# Altium PCB xbowtie.PcbDoc (part 3 of 3)
Units mil, origin at the board's own origin, x right, y up, seen from the top; angles counter-clockwise.
Board outline 3822.83 x 3919.29 mil, 4 copper layers (Top Layer, GND, POWER, Bottom Layer), stack 53.912 mil thick; 127 components, 86 nets, 452 pads, 412 vias.
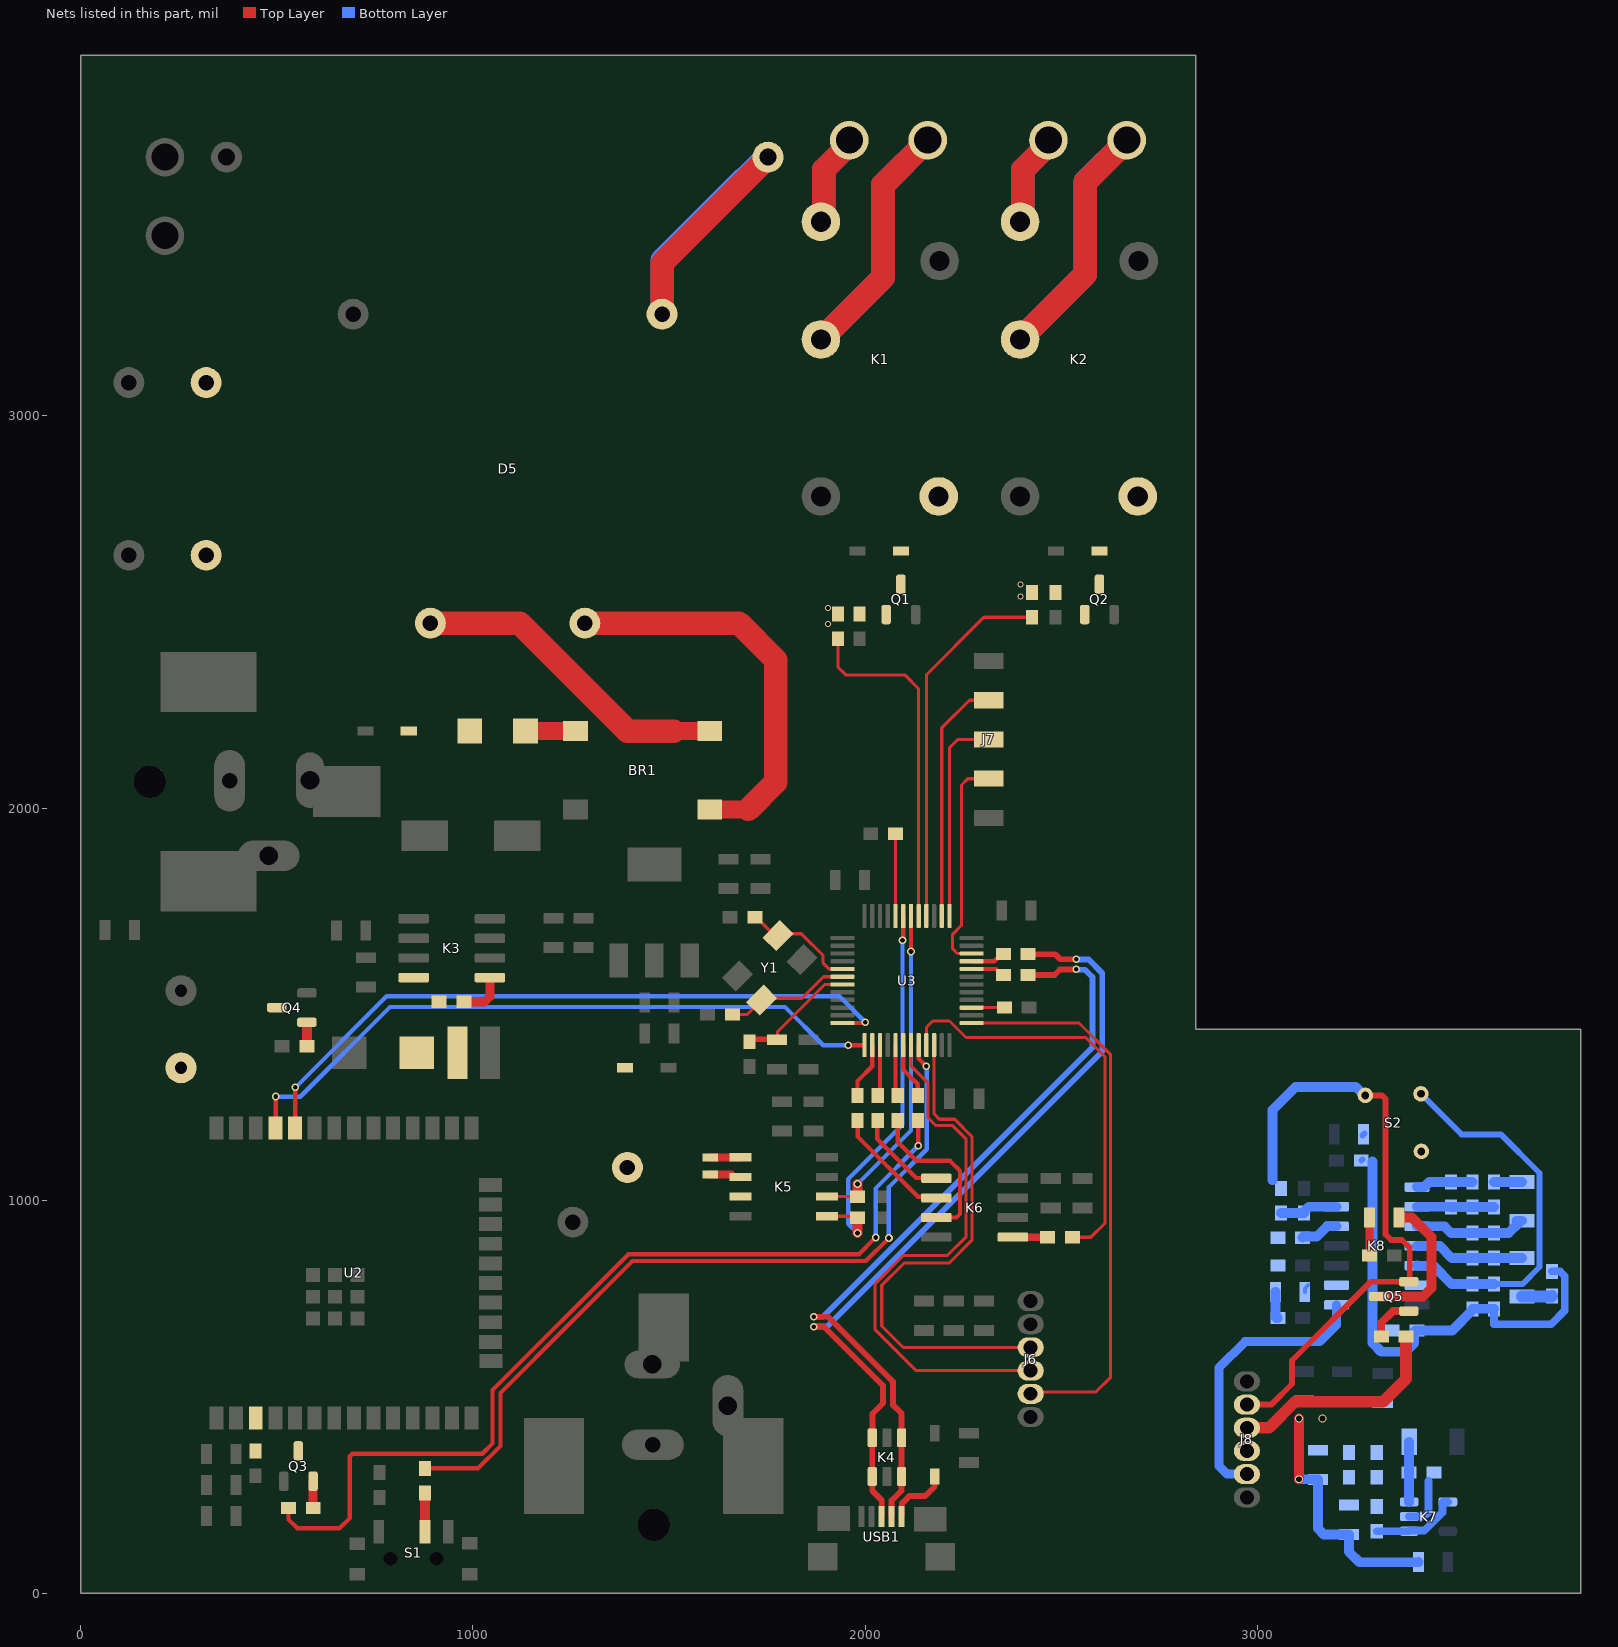
[diagram p4: the nets of this part, all layers, seen from the top]

## Via types
v1: diameter 20, hole 15, Top Layer to Bottom Layer, tented both sides, 304 vias
v2: diameter 19.68, hole 11.81, Top Layer to Bottom Layer, tented both sides, 29 vias
v3: diameter 15, hole 10, Top Layer to Bottom Layer, tented both sides, 28 vias
v4: diameter 19.68, hole 11.81, Top Layer to GND, tented both sides, 18 vias
v5: diameter 19.68, hole 11.81, GND to Bottom Layer, tented both sides, 13 vias
v6: diameter 23.62, hole 13.78, Top Layer to Bottom Layer, tented both sides, 10 vias
v7: diameter 10, hole 7, Top Layer to Bottom Layer, tented both sides, 9 vias
v8: diameter 19.68, hole 11.81, Top Layer to Bottom Layer, tented top, 1 vias

## Nets (pads, with @x,y where several pads share a name; then routed paths per layer and width w, separated by ;. In a path a pad name is that pad's centre, name@x,y a point inside that pad or via, vN(x,y) a via of type N, cw(c..) or ccw(c..) an arc to the next point about the centre after c; other vN are vias at no path point) (continued)
GND_S: C33.1 C34.1 C35.1 C36.1 C37.1 C38.1 C40.1@3263.79,1102.36 C41.1 C43.1@3059.06,1031.5 C46.1@3405.51,669.29 C47.1@3547.24,724.4 J8.2 K7.2 Q5.E R28.2 R35.1 R36.1 R37.1 R38.1 S2.3 | length 3586.9
  Top Layer w15: J8.2@2972.44,480.32 3034.67,480.32 3087.39,533.03 3087.39,592.49 3288.21,793.31 Q5.E@3385.04,793.31 3385.04,795.42 3387.43,797.81 3387.43,880.09 3367.52,900 3340,900 3325.94,914.06 3325.94,1258.95 3316.53,1268.37 S2.3@3274.13,1268.37
  Top Layer w25: v1(3105,290) v1(3105,445)
  Bottom Layer w15: C40.1@3263.79,1102.36 C40.1@3266.8,1105.37 ; C41.1@3266.8,1166.28 C41.1@3269.81,1169.29 C41.1@3271.97,1171.45
  Bottom Layer w20: K7.2@3385.83,194.88 3385.94,195 3423.28,195 3435,206.72 3435,286.01 ; R38.1@3602.36,724.4 3602.36,685.14 3747.64,685.14 3782.5,720 3782.5,807.5 3770,820 R37.1@3750,820
  Bottom Layer w25: 3037.5,1052.29 3037.5,1230.93 3096.57,1290 3249.96,1290 3271.6,1268.37 S2.3@3274.13,1268.37 ; v1(3105,290) 3152.91,290 C35.1@3153.54,289.37 3153.54,164.25 3168.19,149.61 C34.1@3232.28,149.61 3232.28,105.22 3258.76,78.74 C33.1@3409.45,78.74 C33.1@3410,79.29 ; 3292.5,1100 3292.5,637.19 3314.69,615 3376.77,615 3399.01,637.24 3399.01,666.29 3402.01,669.29 C46.1@3405.51,669.29 3495.63,669.29 3547.24,720.9 C47.1@3547.24,724.4 R38.1@3602.36,724.4
  other v1: 3165,445
LED_DRIVER: J6.3 U3.22 | length 1343.1
  Top Layer w8: U3.22@2175.2,1396.46 2175.2,1221.05 2188.75,1207.5 2227.7,1207.5 2271.62,1163.58 2271.62,899.12 2213.75,841.25 2098.75,841.25 2041.96,784.46 2041.96,680.54 2096.52,625.98 J6.3@2421.26,625.98
LED_S: J8.3 R29.1 | length 564.8
  Top Layer w30: J8.3@2972.44,421.26 3028.76,421.26 3095,487.5 3319.5,487.5 3377.96,545.96 R29.1@3377.96,653.54
LIGHT_1_GND: J2.2 K1.3 | length 475.6
  Top Layer w60: K1.3@1886.81,3494.88 1894.16,3502.23 1894.16,3627.47 1959.06,3692.36 J2.2@1959.06,3702.76
  Bottom Layer w60: K1.3@1886.81,3494.88 1894.16,3502.23 1894.16,3627.47 1959.06,3692.36 J2.2@1959.06,3702.76
LIGHT_1_VCC: J2.1 K1.2 | length 1241.3
  Top Layer w60: K1.2@1886.81,3194.88 2045,3353.07 2045,3588.7 J2.1@2159.06,3702.76
  Bottom Layer w60: K1.2@1886.81,3194.88 2045,3353.07 2045,3588.7 J2.1@2159.06,3702.76
LIGHT_2_GND: J5.2 K2.3 | length 475.6
  Top Layer w60: K2.3@2394.29,3494.88 2401.64,3502.23 2401.64,3627.47 2466.54,3692.36 J5.2@2466.54,3702.76
  Bottom Layer w60: K2.3@2394.29,3494.88 2401.64,3502.23 2401.64,3627.47 2466.54,3692.36 J5.2@2466.54,3702.76
LIGHT_2_VCC: J5.1 K2.2 | length 1241.3
  Top Layer w60: K2.2@2394.29,3194.88 2560,3360.59 2560,3595 2666.54,3701.54 J5.1@2666.54,3702.76
  Bottom Layer w60: K2.2@2394.29,3194.88 2560,3360.59 2560,3596.22 J5.1@2666.54,3702.76
NetBR1_1: BR1.1 D5.7 | length 821.4
  Top Layer w45: 1511.81,2196.85 1603.5,2196.85 BR1.1@1603.78,2197.13
  Top Layer w60: D5.7@896.45,2471.89 1118.66,2471.89 1393.7,2196.85 1511.81,2196.85
NetBR1_2: BR1.2 D5.9 | length 1033.3
  Top Layer w45: BR1.2@1603.78,1997.13 1701.85,1997.13
  Top Layer w60: D5.9@1285.08,2471.89 1677.72,2471.89 1771.65,2377.95 1771.65,2066.93 1701.85,1997.13
NetBR1_3: BR1.3 F1.1 | length 127.5
  Top Layer w45: F1.1@1133.78,2197.13 BR1.3@1261.26,2197.13
NetBZ1_1: BZ1.1 Q4.C
NetC7_1: C7.1 C8.1 D4.2 F1.2 | length 2.6
  Bottom Layer w60: C8.1@319.07,3085.93 C8.1@320,3085 ; C7.1@320,2645 C7.1@320.93,2644.07
NetC9_1: C9.1 K3.1 | length 120.3
  Top Layer w23: C9.1@976.66,1506.99 1029.83,1506.99 1043.31,1520.46 K3.1@1043.31,1568.5
NetC9_2: C9.2 D6.2 K3.8 L1.1
NetC18_2: C19.1@1718.5,1722.44 U3.5 Y1.3 | length 293.3
  Top Layer w8: C19.1@1718.5,1722.44 1722,1722.44 1769.03,1675.42 Y1.3@1777.34,1675.42 1782.21,1680.29 1836.81,1680.29 1892.25,1624.84 1892.25,1605.31 1906.84,1590.72 1941.56,1590.72 U3.5@1941.73,1590.55
NetC19_2: C18.1@1661.04,1474.41 U3.6 Y1.1 | length 320.6
  Top Layer w8: C18.1@1661.04,1474.41 1698.82,1474.41 Y1.1@1735.58,1511.17 1740.45,1516.04 1838.54,1516.04 1893.37,1570.87 U3.6@1941.73,1570.87
NetC24_1: C24.1 D7.1 K5.3
NetC34_2: C34.2 R25.1 R26.2 R27.1
NetC39_1: C39.1@3492.13,984.25 K8.2 R30.1 R33.2 | length 196.6
  Bottom Layer w25: K8.2@3405.91,984.65 3406.1,984.45 3491.93,984.45 C39.1@3492.13,984.25 R30.1@3547.24,984.25 R33.2@3602.36,984.25
NetC39_2: C39.1@3492.13,1047.25 K8.1 R30.2 | length 146.6
  Bottom Layer w25: K8.1@3405.91,1034.65 3424.41,1034.65 3437.02,1047.25 C39.1@3492.13,1047.25 R30.2@3547.24,1047.25
NetC42_1: C42.1 C44.1@3547.24,917.33 K8.3 R34.2 | length 298.9
  Bottom Layer w25: K8.3@3405.91,934.65 3475.67,934.65 3492.98,917.33 C44.1@3547.24,917.33 R34.2@3602.36,917.32 3602.67,917.63 3639.59,917.63 3665.11,943.16 3659.45,948.82 C42.1@3673.23,948.82
NetC42_2: C42.2 R33.1 | length 70.9
  Bottom Layer w25: R33.1@3602.36,1047.25 C42.2@3673.23,1047.24
NetC43_2: C43.1@3059.06,968.5 K8.13 R32.1 | length 150.5
  Bottom Layer w25: C43.1@3059.06,968.5 R32.1@3118.11,968.5 3118.11,972 3130.76,984.65 K8.13@3200.79,984.65
NetC44_1: C44.1@3547.24,854.33 C45.2 K8.4 R34.1 | length 279.9
  Bottom Layer w25: K8.4@3405.91,884.65 3406.4,884.15 3464.42,884.15 3494.24,854.33 C44.1@3547.24,854.33 R34.1@3602.36,854.32 C45.2@3673.23,854.33
NetC45_1: C45.1 R37.2 | length 77.6
  Bottom Layer w30: C45.1@3673.23,755.91 3749.5,755.91 3750,756.41 R37.2@3750,757
NetC46_2: C46.1@3342.51,669.29 K8.6 S2.1
NetC47_2: C47.1@3547.24,787.4 K8.5 R38.2 S2.2 | length 975.4
  Bottom Layer w15: S2.2@3415.87,1272.3 3519.07,1169.1 3619.68,1169.1 3718.22,1070.55 3718.22,831.02 3674.6,787.4 R38.2@3602.36,787.4
  Bottom Layer w25: K8.5@3405.91,834.65 3406.4,834.15 3447.49,834.15 3494.24,787.4 C47.1@3547.24,787.4 R38.2@3602.36,787.4
NetD1_2: D1.2 K1.4 Q1.C
NetD2_2: D2.2 K2.4 Q2.C
NetD3_2: D3.2 USB1.1 | length 160.3
  Top Layer w15: USB1.1@2092.52,194.88 2092.89,195.26 2092.89,227.87 2112.13,247.1 2152.13,247.1 2176.79,271.76 D3.2@2176.79,296.87
NetD5_1: D5.1 R5.2 | length 1028.5
  Top Layer w60: D5.1@1481.93,3259.29 1481.93,3389.33 R5.2@1752.05,3659.45
  Bottom Layer w60: D5.1@1481.93,3259.29 1481.93,3396.93 1690,3605 1692.53,3605 1746.98,3659.45 R5.2@1752.05,3659.45
NetD8_1: D8.1 Q5.C | length 381.4
  Top Layer w25: Q5.C@3307.87,755.91 3420.91,755.91 3442.5,777.5 3442.5,907.5 3392.5,957.5 D8.1@3359.8,957.5 3359.8,954.84 D8.1@3361.08,953.56
NetD8_2: D8.2 R23.1 | length 97.5
  Top Layer w20: R23.1@3285,860 D8.2@3285,957.5
NetD9_1: D9.1 K8.9 | length 20.6
  Bottom Layer w10: D9.1@3119.96,767.72 3119.96,775.87 D9.1@3128.74,784.65
NetD9_2: D9.2 R31.1 | length 71.2
  Bottom Layer w25: D9.2@3045.15,767.72 3045.15,703.79 3048.15,700.79 R31.1@3051.18,700.79
NetJ6_5: J6.5 U3.25 | length 1430.8
  Top Layer w8: U3.25@2270.87,1452.76 2544.37,1452.76 2625,1372.13 2625,550 2587.3,512.3 2425.69,512.3 J6.5@2421.26,507.87
NetJ8_5: J8.5 K8.8 | length 726.2
  Bottom Layer w23: J8.5@2972.44,303.15 2921.85,303.15 2901,324 2901,574 2968,641 3158,641 3200.79,683.79 K8.8@3200.79,734.65
NetK5_1: K5.1 Y2.2 | length 78
  Top Layer w20: Y2.2@1604.33,1110.24 1604.43,1110.33 1682.15,1110.33 K5.1@1682.24,1110.43
NetK5_2: K5.2 Y2.1 | length 80.6
  Top Layer w20: Y2.1@1604.33,1066.93 1658.25,1066.93 1664.74,1060.43 K5.2@1682.24,1060.43
NetK6_1: K6.1 R14.1 | length 240.4
  Top Layer w11: R14.1@2031.5,1204.72 2030.1,1203.32 2030.1,1157.4 2129.8,1057.7 2180.49,1057.7 K6.1@2181.1,1057.09
NetK6_2: K6.2 R16.1 | length 306.8
  Top Layer w11: R16.1@1980.32,1204.72 1980.32,1163.44 2133.87,1009.88 2178.31,1009.88 K6.2@2181.1,1007.09
NetK6_3: K6.3 R15.1 | length 417.9
  Top Layer w11: R15.1@2082.68,1204.72 2082.68,1149.82 2131.04,1101.46 2216.04,1101.46 2241.25,1076.25 2241.25,966.25 2232.09,957.09 K6.3@2181.1,957.09
NetK6_5: K6.5 R17.1 | length 88.5
  Top Layer w20: K6.5@2375.98,907.09 2404.76,906.73 2455.44,906.73 R17.1@2464.44,906.69
NetK7_1: K7.1 K7.4 R26.1 | length 227.1
  Bottom Layer w20: R26.1@3303.16,157.48 K7.1@3385.83,157.48 3387.44,159.09 3424.15,159.09 3470.83,205.77 3470.83,230.67 3472.44,232.28 K7.4@3484.65,232.28
NetK7_3: K7.3 R24.1 R28.1 | length 153.5
  Bottom Layer w25: K7.3@3385.83,232.28 R28.1@3385.83,307.09 R24.1@3385.83,385.83
NetK8_12: K8.12 R35.2 | length 98.7
  Bottom Layer w25: R35.2@3114.17,905.51 3117.17,908.51 3150.51,908.51 3176.65,934.65 K8.12@3200.79,934.65
NetQ1_1: Q1.B R1.2 R3.2
  other v3: 1905,2470 1905,2510
NetQ2_1: Q2.B R2.2 R4.2
  other v3: 2395,2540 2395,2570
NetQ3_1: Q3.E R13.2 | length 68.2
  Top Layer w23: Q3.E@592.52,285.04 592.76,284.8 R13.2@592.76,217.24
  Top Layer w25: R13.2@592.76,217.24 R13.2@593,217
NetQ4_1: Q4.B R18.2 | length 61
  Top Layer w25: R18.2@576.77,1393.7 Q4.B@576.77,1454.72
NetQ5_1: Q5.B R29.2 | length 117.7
  Top Layer w20: R29.2@3314.96,653.54 3314.96,688.96 3344.5,718.5 Q5.B@3385.04,718.5
NetR1_1: R1.1 U3.41 | length 879.5
  Top Layer w8: R1.1@1930,2432 1930,2360 1950,2340 2100,2340 2135.83,2304.17 U3.41@2135.83,1725.59
NetR2_1: R2.1 U3.40 | length 945.1
  Top Layer w8: U3.40@2155.51,1725.59 2155.68,1725.76 2155.68,2340.69 2302,2487 R2.1@2425,2487
NetR6_1: R6.1 U3.32 | length 87
  Top Layer w11: U3.32@2270.87,1590.55 2332.95,1590.55 2348.11,1575.39 R6.1@2351.61,1575.39
NetR7_1: R7.1 U3.33 | length 91.1
  Top Layer w11: U3.33@2270.87,1610.24 2328.74,1610.24 2349.75,1631.25 R7.1@2353.25,1631.25
NetR8_1: R8.1 U3.18 | length 144.5
  Top Layer w11: U3.18@2096.46,1396.46 2096.46,1333.96 2100.91,1329.51 2100.91,1329.11 2121.61,1308.41 2122.01,1308.41 2133.86,1296.56 R8.1@2133.86,1267.72
NetR10_2: R10.2 U3.44 | length 209.4
  Top Layer w8: U3.44@2076.77,1725.59 R10.2@2076.77,1935.04
NetR12_1: R12.1 U3.27 | length 83.5
  Top Layer w8: U3.27@2270.87,1492.13 2297.57,1492.13 R12.1@2354.33,1492.13
NetR21_2: R21.2 S1.2 | length 98.8
  Top Layer w25: R21.2@877.5,255 877.74,254.76 877.74,156.63 S1.2@877.97,156.4
NRST: C20.1 R9.2 U3.7 | length 308.7
  Top Layer w8: R9.2@1705,1405 R9.2@1711.55,1411.55 ; C20.1@1776.55,1411.55 1776.55,1431.09 1896.46,1551.01 1941.56,1551.01 U3.7@1941.73,1551.18
  Top Layer w15: R9.2@1711.55,1411.55 C20.1@1776.55,1411.55
RTA_SCL: K5.6 R22.1 U3.42 | length 850.2
  Top Layer w8: K5.6@1902.24,1010.43 1979.72,1010.43 R22.1@1980,1010.16
  Top Layer w11: U3.42@2116.15,1725.58 2116.15,1635.1 v2(2116.25,1635)
  Top Layer w25: v5(1980,1042.5) 1980,1010.16 R22.1@1980.32,1009.84
  Bottom Layer w11: v5(1980,1042.5) 2116.25,1178.75 v2(2116.25,1635)
  other v2: 1980,1042.5
  other v5: 2116.25,1635
RTA_SDA: K5.5 R20.1 U3.43 | length 995
  Top Layer w8: K5.5@1902.24,960.43 1976.57,960.43 R20.1@1980.32,956.69
  Top Layer w11: v2(2094.8,1663.75) 2096.44,1665.4 U3.43@2096.44,1725.58
  Top Layer w25: v2(1980,917.5) 1980.32,917.82 R20.1@1980.32,956.69
  Bottom Layer w11: v2(1980,917.5) 1956.25,941.25 1956.25,1055 2094.91,1193.66 2094.91,1663.64 v2(2094.8,1663.75)
  other v4: 1980,917.5
SENSOR_ONOFF: R21.1 U3.20 | length 2044.6
  Top Layer w11: R21.1@877.5,318 1013,318 1070,375 1070,510 1246.25,686.25 1406.25,846.25 2001.24,846.25 v4(2059.99,905.01) ; U3.20@2135.83,1396.46 2135.84,1362.02 v2(2155.35,1342.5)
  Bottom Layer w11: v4(2059.99,905.01) 2059.99,1034.81 2156.34,1131.16 2156.34,1181.16 2156.25,1181.25 2156.25,1341.6 v2(2155.35,1342.5)
  other v2: 2059.99,905.01
  other v5: 2155.35,1342.5
SWCLK: J7.3 U3.37 | length 537.9
  Top Layer w8: U3.37@2214.57,1725.59 2214.57,2154.57 2235.41,2175.41 J7.3@2314.85,2175.41
SWDIO: J7.2 U3.34 | length 556.4
  Top Layer w8: U3.34@2270.87,1629.92 2270.69,1630.09 2234.59,1630.09 2222.5,1642.19 2222.5,1679.12 2245,1701.62 2245,2059.33 2261.08,2075.41 J7.2@2314.85,2075.41
TDI: J7.4 U3.38 | length 628.5
  Top Layer w8: U3.38@2194.88,1725.59 2194.88,2204.88 2265.41,2275.41 J7.4@2314.85,2275.41
TEMP_ADC: C35.2 J8.4 R25.2 R27.2
TEMP_IN_CS: R16.2 U3.14 | length 144.3
  Top Layer w11: R16.2@1980.32,1267.72 1980,1282.72 1980,1305 2017.54,1342.54 2017.54,1369.75 U3.14@2017.72,1396.46
TEMP_IN_OT: R17.2 U3.21 | length 1067.3
  Top Layer w8: U3.21@2155.51,1396.46 2155.68,1396.63 2155.68,1441.69 2172,1458 2214.5,1458 2256.5,1416 2561.33,1416 2611,1366.33 2611,943 2574.69,906.69 R17.2@2527.44,906.69
TEMP_IN_SCLK: R14.2 U3.15 | length 129.6
  Top Layer w11: R14.2@2031.5,1267.72 2036.13,1282.72 2037.23,1286.27 2037.23,1369.75 U3.15@2037.4,1396.46
TEMP_IN_SIO: R15.2 U3.17 | length 131.2
  Top Layer w11: U3.17@2076.77,1396.46 2076.77,1273.62 R15.2@2082.68,1267.72
TEMPERATURE_ADC: J6.4 U3.19 | length 1409.7
  Top Layer w8: U3.19@2116.14,1396.46 2116.14,1343.86 2159.36,1300.64 2159.36,1211.89 2180,1191.25 2222.5,1191.25 2256.75,1157 2256.75,908 2209,860.25 2096.5,860.25 2025,788.75 2025,671.25 2129.32,566.93 J6.4@2421.26,566.93
USB_N: K4.1 K4.6 R6.2 USB1.2 | length 1984.2
  Top Layer w15: v4(1868.75,704.44) 1869.09,704.09 1905.01,704.09 2070,539.11 2070,480 2092.5,457.5 2092.5,454.28 ; USB1.2@2066.93,194.88 2066.78,195.03 2066.78,235.53 2092.52,261.27 K4.6@2092.52,297.05 K4.1@2092.52,395.87 2092.52,454.26 ; R6.2@2416.25,1575 2481.95,1575 2496.02,1589.07 2536.8,1589.07 v2@2537.23,1589.51
  Bottom Layer w15: v4(1868.75,704.44) 1872.06,704.44 1872.41,704.09 1892.09,704.09 2578.75,1390.75 2578.75,1569.65 2559.74,1588.66 2538.17,1588.66 v4(2537.28,1589.56)
  other v2: 1868.75,704.44 2537.28,1589.56
USB_P: K4.3 K4.4 R7.2 USB1.3 | length 2024.1
  Top Layer w15: v4(1868.75,678.75) 1869.09,679.09 1894.66,679.09 2045,528.75 2045,483.94 2018.56,457.5 2018.56,396.71 K4.3@2017.72,395.87 K4.4@2017.72,297.05 2017.72,260.5 2041.78,236.44 2041.78,219.17 2041.71,219.1 2041.71,195.26 USB1.3@2041.63,195.18 ; R7.2@2418.36,1628.15 2483.68,1628.15 2496.59,1615.24 v2(2537.28,1615.24)
  Bottom Layer w15: v4(1868.75,678.75) 1869.09,679.09 1902.45,679.09 2603.75,1380.39 2603.75,1580 2569.2,1614.56 2537.96,1614.56 v2(2537.28,1615.24)
  other v2: 1868.75,678.75
  other v4: 2537.28,1615.24
WIFI_EN: R8.2 R13.1 | length 2358.1
  Top Layer w11: R13.1@530,217 530,187.5 552.5,165 660,165 686.25,191.25 686.25,348.56 692.69,355 1023.75,355 1050,381.25 1050,517.5 1395.75,863.25 1983.25,863.25 v2(2026.25,906.25) ; R8.2@2133.86,1204.72 2134.43,1204.15 2134.43,1140.57 v2(2135,1140)
  Bottom Layer w11: v2(2026.25,906.25) 2026.25,1031.25 v2(2135,1140)
  other v4: 2026.25,906.25
  other v5: 2135,1140
WIFI_OUT: Q3.C R11.2 U2.3
WIFI_RXD: U2.34 U3.12 | length 1738.1
  Top Layer w11: v4(547.41,1288.84) 547.5,1288.75 U2.34@547.5,1186.25 ; U3.12@1941.73,1452.76 1995.41,1452.76 1997.65,1455 v2(2000,1455)
  Bottom Layer w11: v4(547.41,1288.84) 547.59,1288.84 780,1521.25 1933.75,1521.25 v2(2000,1455)
  other v2: 547.41,1288.84
  other v5: 2000,1455
WIFI_TXD: U2.35 U3.13 | length 1715.9
  Top Layer w11: U2.35@497.5,1186.25 v2(497.5,1265) v4(497.5,1266.25) ; v5(1956.25,1396.25) U3.13@1998.02,1396.25 ; U3.13@1998.03,1396.26 U3.13@1998.03,1396.46
  Bottom Layer w11: v2(497.5,1265) 560,1265 788.75,1493.75 1795,1493.75 1892.5,1396.25 v5(1956.25,1396.25)
  other v2: 1956.25,1396.25
pads on no net: "S1.  " J3. J4. J6.6 J8.6 K1.1 K2.1 K3.2 K3.3 K3.5 K5.7 K6.6 K6.7 K8.7 K8.10 K8.11 R19.1 R36.2 S1.0 S1.1 U2.4 U2.5 U2.6 U2.7 U2.8 U2.9 U2.10 U2.11 U2.12 U2.13 U2.14 U2.16 U2.17 U2.18 U2.19 U2.20 U2.21 U2.22 U2.23 U2.24 U2.25 U2.26 U2.27 U2.28 U2.29 U2.30 U2.31 U2.32 U2.33 U2.36 U2.37 U3.1 U3.2 U3.3 U3.4 U3.10 U3.11 U3.16 U3.26 U3.28 U3.29 U3.30 U3.31 U3.39 U3.45 U3.46 USB1. USB1.4

## Polygon pours and split planes (outlines as drawn)
GND_S on Top Layer "GND_S_L01_P040" (solid, pour order 40): 2900,130 2900,1300 3000,1400 3680,1400 3780,1300 3780,140 3680,40 2990,40
GND on Top Layer "GND_L01_P030" (solid, remove dead copper, pour order 30): 25,3165 25,1230 1095,1230 1095,35 2705,35 2800,130 2800,2455 1630,2455 1460,2285 635,2285 455,2465 215,2465 215,3165 ccw(c200,3165) 200,3180 40,3180 ccw(c40,3165)
3V3DC on Top Layer "3V3DC_L01_P023" (solid, pour order 23): 1467.5,1517.7 1467.5,1325 ccw(c1479.99,1324.99) 1480,1312.5 1540,1312.5 ccw(c1540,1322.5) 1550,1322.5 1550,1527.5 cw(c1557.5,1527.5) 1557.5,1535 1592.5,1535 ccw(c1592.5,1547.5) 1605,1547.5 1605,1814.04 cw(c1623.46,1814.04) 1623.46,1832.5 1782.93,1832.5 ccw(c1782.93,1867.67) 1807.8,1842.8 1837.5,1872.5 1947.5,1872.5 cw(c1947.5,1862.5) 1957.5,1862.5 1957.5,1715 1957.5,1697.5 ccw(c1965,1697.5) 1965,1690 1984.58,1690 1997.5,1690 ccw(c1997.5,1697.5) 2005,1697.5 2005,1750.45 cw(c2017.85,1750.45) 2010.95,1761.29 2024.06,1769.63 ccw(c2014.29,1785) 2032.5,1785 2032.5,1892.5 ccw(c2022.5,1892.5) 2022.5,1902.5 1555,1902.5 1555,1755 1516.79,1733.98 ccw(c1527.74,1714.06) 1505,1714.04 1505,1587.3 cw(c1463.82,1587.28) 1493.3,1558.52 1477.5,1542.3 ccw(c1502.73,1517.71)
NetC24_1 on Top Layer "NETC24_1_L01_P013" (solid, pour order 13): 1337.5,990 1722.5,990 ccw(c1722.5,997.5) 1730,997.5 1730,1030 ccw(c1722.5,1030) 1722.5,1037.5 1497.5,1037.5 cw(c1497.5,1060) 1475,1060 1475,1263.86 ccw(c1454.16,1263.87) 1468.89,1278.61 cw(c1514.5,1324.22) 1450,1324.22 1450,1352.5 ccw(c1430,1352.5) 1430,1372.5 1342.5,1372.5 ccw(c1342.49,1350.01) 1320,1350 1320,1007.5 ccw(c1337.5,1007.5)
NetC7_1 on Top Layer "NETC7_1_L01_P029" (solid, pour order 29): 265,3175 415,3175 cw(c415,3160) 430,3160 430,2610 ccw(c445,2610) 445,2595 540.86,2595 cw(c540.86,2536.72) 582.07,2577.93 899.39,2260.61 ccw(c949.14,2310.35) 949.14,2240 1050,2240 cw(c1050,2225) 1065,2225 1065,2135 cw(c1050,2135) 1050,2120 815,2120 cw(c815,2135) 800,2135 800,2202.93 ccw(c758.79,2202.93) 787.93,2232.07 532.07,2487.93 ccw(c490.86,2446.73) 490.86,2505 260,2505 cw(c260,2525) 240,2525 240,3150 cw(c265,3150)
GND on Top Layer "GND_L01_P028" (solid, pour order 28): 367.5,492.5 367.5,157.5 cw(c342.5,157.5) 342.5,132.5 297.5,132.5 cw(c297.5,157.5) 272.5,157.5 272.5,912.5 cw(c310,912.5) 310,950 790,950 cw(c790,920) 820,920 820,609.32 409.35,614.07 ccw(c408.87,572.7) 367.5,572.7
3V3DC on Top Layer "3V3DC_L01_P025" (solid, pour order 25): 2387.5,711.76 cw(c2403.49,692.35) 2403.5,717.5 2482.85,717.5 ccw(c2482.85,722.15) 2487.5,722.15 2487.5,800 ccw(c2475,800) 2475,812.5 2092.5,812.5 ccw(c2092.5,807.5) 2087.5,807.5 2087.5,722.5 ccw(c2102.5,722.5) 2102.5,707.5 2375.93,707.5 ccw(c2375.93,725.34)
NetD1_2 on Top Layer "NETD1_2_L01_P000" (solid, pour order 0): 2063.75,2530 2122.5,2530 ccw(c2122.5,2547.5) 2140,2547.5 2140,2667.5 cw(c2162.5,2667.5) 2162.5,2690 2247.5,2690 ccw(c2247.5,2712.5) 2270,2712.5 2270,2852.5 ccw(c2242.5,2852.5) 2242.5,2880 2066.25,2880 ccw(c2066.25,2858.75) 2045,2858.75 2045,2548.75 ccw(c2063.75,2548.75)
3V3DC on Top Layer "3V3DC_L01_P024" (solid, pour order 24): 1740,1197.5 1740,1102.5 ccw(c1758.7,1102.5) 1758.7,1083.8 1951.3,1083.8 ccw(c1951.3,1100) 1967.5,1100 1967.5,1131.89 ccw(c1917.75,1131.89) 1952.93,1167.07 1915.3,1204.7 ccw(c1890.43,1179.83) 1890.43,1215 1757.5,1215 ccw(c1757.5,1197.5)
5VDC on Top Layer "Top Layer-5VDC" (solid, pour order 22): 1027.5,1275 1097.5,1275 ccw(c1097.5,1297.5) 1120,1297.5 1120,1790 cw(c1127.5,1790) 1127.5,1797.5 1135,1797.5 cw(c1135,1787.5) 1145,1787.5 1145,1705 ccw(c1160,1705) 1160,1690 1307.5,1690 cw(c1307.5,1675) 1322.5,1675 1322.5,1565 ccw(c1340,1565) 1340,1547.5 1405,1547.5 ccw(c1405,1560) 1417.5,1560 1417.5,1713.36 ccw(c1335.09,1713.36) 1393.36,1771.64 1356.34,1808.66 ccw(c1316.9,1769.23) 1316.89,1825 1222.5,1825 cw(c1222.5,1845) 1202.5,1845 1202.5,1985 ccw(c1182.5,1985) 1182.5,2005 1002.5,2005 ccw(c1002.5,1980) 977.5,1980 977.5,1707.5 ccw(c995,1707.5) 995,1690 1085,1690 cw(c1085,1682.5) 1092.5,1682.5 1092.5,1485 cw(c1077.5,1485) 1077.5,1470 1027.5,1470 ccw(c1027.49,1447.51) 1005,1447.5 1005,1297.5 ccw(c1027.5,1297.5)
NetD2_2 on Top Layer "NETD2_2_L01_P004" (solid, pour order 4): 2575,2530 2630,2530 ccw(c2630,2555) 2655,2555 2655,2700 2765,2700 ccw(c2765,2725) 2790,2725 2790,2850 ccw(c2765,2850) 2765,2875 2630,2875 ccw(c2630,2850) 2605,2850 2605,2755 cw(c2590,2755) 2590,2740 2575,2740 ccw(c2575,2715) 2550,2715 2550,2555 ccw(c2575,2555)
AC_LINE_1 on Top Layer "AC_LINE_1_L01_P005" (solid, pour order 5): 154.92,3749.92 424.92,3749.92 cw(c424.92,3719.92) 454.92,3719.92 454.92,3609.92 cw(c424.92,3609.92) 424.92,3579.92 154.92,3579.92 cw(c154.92,3609.92) 124.92,3609.92 124.92,3719.92 cw(c154.92,3719.92)
AC_LINE_2 on Top Layer "AC_LINE_2_L01_P006" (solid, pour order 6): 160,3550 272.83,3550 cw(c272.83,3502.84) 320,3502.83 320,3375 ccw(c360,3375) 360,3335 760,3335 cw(c760,3315) 780,3315 780,3220 cw(c760,3220) 760,3200 160,3200 cw(c160,3235) 125,3235 125,3515 cw(c160,3515)
NetBZ1_1 on Top Layer "NETBZ1_1_L01_P009" (solid, pour order 9): 542.5,1510 542.5,1472.5 cw(c532.5,1472.5) 532.5,1462.5 427.5,1462.5 ccw(c427.5,1437.5) 402.5,1437.5 402.5,1297.5 cw(c375,1297.5) 375,1270 205,1270 cw(c205,1297.5) 177.5,1297.5 177.5,1437.5 cw(c200,1437.5) 200,1460 327.5,1460 ccw(c327.5,1482.5) 350,1482.5 350,1510 cw(c360,1510) 360,1520 532.5,1520 cw(c532.5,1510)
NetC9_2 on Top Layer "NETC9_2_L01_P014" (solid, pour order 14): 810,1585 925,1585 cw(c925,1565) 945,1565 945,1480 ccw(c962.5,1480) 962.5,1462.5 972.5,1462.5 cw(c972.5,1440) 995,1440 995,1300 cw(c972.5,1300) 972.5,1277.5 812.5,1277.5 cw(c812.5,1300) 790,1300 790,1565 cw(c810,1565)
GND_S on Bottom Layer "GND_S_L04_P041" (solid, pour order 41): 2900,130 2900,1300 3000,1400 3680,1400 3800,1280 3800,160 3680,40 2990,40
GND on Bottom Layer "GND_L04_P038" (solid, pour order 38): 20,2340 1268.99,2340 1480,2510 1860,2510 2820,2510 2820,20 200,20 200,360 1140,360 1140,1240 20,1240
12VDC on Bottom Layer "12VDC_L04_P036" (solid, pour order 36): 480,2190 480,1980 ccw(c510,1980) 510,1950 685,1950 ccw(c685,1979.03) 714.03,1979.03 714.03,2094.03 cw(c740,2094.03) 740,2120 1274.59,2120 ccw(c1274.59,2227.2) 1344.55,2145.97 1874.59,2602.42 cw(c1921.93,2547.45) 1921.94,2620 2475,2620 ccw(c2475,2640) 2495,2640 2495,2870 ccw(c2470,2870) 2470,2895 2320,2895 ccw(c2320,2870) 2295,2870 2295,2720 cw(c2265,2720) 2265,2690 2055,2690 2025,2690 cw(c2025,2720) 1995,2720 1995,2865 ccw(c1965,2865) 1965,2895 1810,2895 ccw(c1810,2860) 1775,2860 1775,2635 cw(c1744.87,2635) 1764.66,2612.28 1325.24,2229.45 cw(c1300,2258.42) 1300,2220 570,2220 510,2220 ccw(c510,2190)
AC_LINE_2 on Bottom Layer "AC_LINE_2_L04_P003" (solid, pour order 3): 160,3550 272.83,3550 cw(c272.83,3502.84) 320,3502.83 320,3375 ccw(c360,3375) 360,3335 760,3335 cw(c760,3315) 780,3315 780,3220 cw(c760,3220) 760,3200 160,3200 cw(c160,3235) 125,3235 125,3515 cw(c160,3515)
AC_LINE_1 on Bottom Layer "AC_LINE_1_L04_P002" (solid, pour order 2): 155,3750 425,3750 cw(c425,3720) 455,3720 455,3610 cw(c425,3610) 425,3580 155,3580 cw(c155,3610) 125,3610 125,3720 cw(c155,3720)
3V3DC on POWER (split plane): 550,3094.82 550,2236.2 549.34,2235.66 469.34,2155.66 467.47,2153.37 466.07,2150.77 465.22,2147.94 464.93,2145 464.93,2020 465.22,2017.06 466.07,2014.23 467.47,2011.63 469.34,2009.34 534.34,1944.34 536.63,1942.47 539.23,1941.07 542.06,1940.22 545,1939.93 649.93,1939.93 649.93,1605 650.22,1602.06 651.07,1599.23 652.47,1596.63 654.34,1594.34 694.34,1554.34 696.63,1552.47 699.23,1551.07 702.06,1550.22 705,1549.93 915,1549.93 917.94,1550.22 920.77,1551.07 923.37,1552.47 925.66,1554.34 945.66,1574.34 947.53,1576.63 948.93,1579.23 949.78,1582.06 950.07,1585 950.07,1645 949.78,1647.94 948.93,1650.77 947.53,1653.37 945.66,1655.66 915.66,1685.66 913.37,1687.53 910.77,1688.93 907.94,1689.78 905,1690.07 806.24,1690.07 795.07,1701.24 795.07,2118.76 811.24,2134.93 1350,2134.93 1352.94,2135.22 1355.77,2136.07 1358.37,2137.47 1360.66,2139.34 1831.24,2609.93 2490,2609.93 2492.94,2610.22 2495.77,2611.07 2498.37,2612.47 2500.66,2614.34 2545.66,2659.34 2547.53,2661.63 2548.93,2664.23 2549.78,2667.06 2550.07,2670 2550.07,2845 2549.78,2847.94 2548.93,2850.77 2547.53,2853.37 2545.66,2855.66 2496.32,2905 2794.92,2905 2794.92,20.1 20.1,20.1 20.1,460 360,460 360,1187.5 20.1,1187.5 20.1,3175 550,3175
12VDC on POWER (split plane): 2519.93,2838.76 2519.93,2676.24 2483.76,2640.07 1825,2640.07 1822.06,2639.78 1819.23,2638.93 1816.63,2637.53 1814.34,2635.66 1343.76,2165.07 805,2165.07 802.06,2164.78 799.23,2163.93 796.63,2162.53 794.34,2160.66 769.34,2135.66 767.47,2133.37 766.07,2130.77 765.22,2127.94 764.93,2125 764.93,1695 765.22,1692.06 766.07,1689.23 767.47,1686.63 769.34,1684.34 789.34,1664.34 791.63,1662.47 794.23,1661.07 797.06,1660.22 800,1659.93 898.76,1659.93 919.93,1638.76 919.93,1591.24 908.76,1580.07 711.24,1580.07 680.07,1611.24 680.07,1955 679.78,1957.94 678.93,1960.77 677.53,1963.37 675.66,1965.66 673.37,1967.53 670.77,1968.93 667.94,1969.78 665,1970.07 551.24,1970.07 495.07,2026.24 495.07,2138.76 566.24,2209.93 1305,2209.93 1307.94,2210.22 1310.77,2211.07 1313.37,2212.47 1315.66,2214.34 1785.66,2684.34 1787.53,2686.63 1788.93,2689.23 1789.78,2692.06 1790.07,2695 1790.07,2848.76 1831.24,2889.93 1938.76,2889.93 1969.93,2858.76 1969.93,2740 1970.22,2737.06 1971.07,2734.23 1972.47,2731.63 1974.34,2729.34 2014.34,2689.34 2016.63,2687.47 2019.23,2686.07 2022.06,2685.22 2025,2684.93 2250,2684.93 2252.94,2685.22 2255.77,2686.07 2258.37,2687.47 2260.66,2689.34 2305.66,2734.34 2307.53,2736.63 2308.93,2739.23 2309.78,2742.06 2310.07,2745 2310.07,2848.76 2351.24,2889.93 2468.76,2889.93
3V3DC on POWER (split plane): 3802.74,20.1 2885.08,20.1 2885.08,1416.91 3802.74,1416.91
5VDC on POWER (split plane): 1144.93,1458.76 1144.93,1271.24 1074.34,1200.66 1072.47,1198.37 1071.07,1195.77 1070.22,1192.94 1069.93,1190 1069.93,850 1070.22,847.06 1071.07,844.23 1072.47,841.63 1074.34,839.34 1139.34,774.34 1141.63,772.47 1144.23,771.07 1147.06,770.22 1150,769.93 1418.76,769.93 1554.93,633.76 1554.93,610 1554.93,536.24 1533.76,515.07 1381.24,515.07 1360.07,536.24 1360.07,630 1359.78,632.94 1358.93,635.77 1357.53,638.37 1355.66,640.66 1305.66,690.66 1303.37,692.53 1300.77,693.93 1297.94,694.78 1295,695.07 1051.24,695.07 1015.07,731.24 1015.07,1458.76 1041.24,1484.93 1118.76,1484.93
3V3DC on POWER (split plane): 2284.34,2865.66 2282.47,2863.37 2281.07,2860.77 2280.22,2857.94 2279.93,2855 2279.93,2751.24 2243.76,2715.07 2031.24,2715.07 2000.07,2746.24 2000.07,2865 1999.78,2867.94 1998.93,2870.77 1997.53,2873.37 1995.66,2875.66 1966.32,2905 2323.68,2905
GND on GND (split plane): 540.69,3102.44 540.69,2237.62 1283.19,2237.62 1750.69,2705.12 1750.69,2912.62 2794.92,2912.62 2794.92,20.1 20.1,20.1 20.1,457.5 342.5,457.5 342.5,1185 20.1,1185 20.1,3182.62 540.69,3182.62
GND on GND (split plane): 3802.74,20.1 2870.08,20.1 2870.08,1416.91 3802.74,1416.91

## Other copper
Top Layer:
  region net 3V3DC: 375,480 375,140 ccw(c385,140) 385,130 420,130 ccw(c420,142.5) 432.5,142.5 432.5,247.5 cw(c438.75,247.5) 438.75,253.75 465,253.75 ccw(c465,261.25) 472.5,261.25 472.5,317.5 ccw(c467.5,317.5) 467.5,322.5 426.25,322.5 cw(c426.25,330) 418.75,330 418.75,481.25 ccw(c410.01,481.26) 410,490 385,490 ccw(c385,480)
  region net NetQ2_1: 2385,2575 2385,2530 ccw(c2395,2530) 2395,2520 2492.93,2520 cw(c2492.93,2490.87) 2513.54,2511.46 cw(c2497.94,2495.86) 2520,2495.86 2520,2460 ccw(c2530,2460) 2530,2450 2585,2450 ccw(c2585,2460) 2595,2460 2595,2510 ccw(c2585,2510) 2585,2520 2570.86,2520 cw(c2570.86,2546.21) 2552.32,2527.68 2530.61,2549.39 cw(c2556.21,2575) 2520,2575 ccw(c2510,2575) 2510,2585 2395,2585 ccw(c2395,2575)
  region net NetQ1_1: 2080,2510 2080,2465 cw(c2075,2465) 2075,2460 1905,2460 cw(c1905,2470) 1895,2470 1895,2510 cw(c1905,2510) 1905,2520 2070,2520 cw(c2070,2510)
  region net WIFI_OUT: 436.25,490 465,490 cw(c465,482.5) 472.5,482.5 472.5,408.75 ccw(c482.5,408.75) 482.5,398.75 575,398.75 cw(c575,388.75) 585,388.75 585,340 cw(c573.76,339.99) 573.75,328.75 436.25,328.75 cw(c436.25,338.75) 426.25,338.75 426.25,480 cw(c436.25,480)
  region net 12VDC: 1825.64,2859.37 2013.14,2859.38 cw(c2013.14,2841.88) 2030.64,2841.88 2030.64,2633.12 cw(c2010.65,2633.12) 2010.64,2613.12 1905.89,2613.12 cw(c1905.88,2665.01) 1869.2,2628.32 1812.31,2685.21 cw(c1831.4,2704.31) 1804.39,2704.31 1804.39,2838.12 cw(c1825.64,2838.12)
  region net 12VDC: 2333.12,2859.37 2520.62,2859.38 cw(c2520.62,2841.88) 2538.12,2841.88 2538.12,2633.12 cw(c2518.13,2633.12) 2518.12,2613.12 2413.37,2613.12 cw(c2413.37,2665.01) 2376.68,2628.32 2319.79,2685.21 cw(c2338.88,2704.31) 2311.88,2704.31 2311.88,2838.12 cw(c2333.12,2838.12)
  region net 12VDC: 770,2175 770,1645 ccw(c780,1645) 780,1635 895,1635 cw(c895,1625) 905,1625 905,1605 cw(c895,1605) 895,1595 710,1595 cw(c710,1615) 690,1615 690,1920 ccw(c665,1920) 665,1945 540,1945 cw(c540,1975) 510,1975 510,2180 cw(c545,2180) 545,2215 730,2215 cw(c730,2175)
  region: 737.5,275 737.5,117.5 792.5,117.5 792.5,275
Bottom Layer:
  region net NetD9_1: 3095,792.5 3095,742.5 ccw(c3105,742.5) 3105,732.5 3132.5,732.5 ccw(c3132.5,740) 3140,740 3140,743.96 3144.27,754.27 3155.73,765.73 3166.04,770 3227.5,770 ccw(c3227.5,780) 3237.5,780 3237.5,795 ccw(c3230,795) 3230,802.5 3105,802.5 ccw(c3105,792.5)
  region net GND_S: 3257.5,1077.5 3292.5,1077.5 3309.31,1077.5 ccw(c3309.31,1085.69) 3317.5,1085.69 3317.5,1282.5 ccw(c3297.5,1282.5) 3297.5,1302.5 3240,1302.5 3240,1095 ccw(c3257.5,1095)
  region net 3V3DC_S: 3102.5,1007.5 3260,1007.5 3272.03,1007.5 3272.03,1043.83 ccw(c3252.74,1043.84) 3263.75,1059.67 3239.37,1076.63 cw(c3248.52,1089.78) 3232.5,1089.78 3232.5,1195 ccw(c3222.5,1195) 3222.5,1205 3097.5,1205 ccw(c3097.5,1195) 3087.5,1195 3087.5,1022.55 ccw(c3102.5,1022.5)
  region net GND_S: 2943.5,506 3066.9,506 ccw(c3066.9,529.78) 3078.78,509.18 3087.31,514.1 cw(c3110.85,473.29) 3110.86,520.41 3467.09,520.41 cw(c3467.09,507.5) 3480,507.5 3480,282.5 cw(c3470.5,282.5) 3470.5,273 3434.5,273 cw(c3434.5,282.5) 3425,282.5 3425,452.5 ccw(c3413.5,452.5) 3413.5,464 3056,464 3007.99,464 cw(c2990.78,475.96) 2990.78,455 2942.5,455 cw(c2942.5,461.96) 2935.54,461.96 2935.54,498.04 cw(c2943.5,498.04)
  region net TEMP_ADC: 2930,342.5 2930,380 cw(c2937.5,380) 2937.5,387.5 3325,387.5 cw(c3325,380) 3332.5,380 3332.5,342.62 cw(c3325,342.5) 3325,335 2937.5,335 cw(c2937.5,342.5)
  region net GND: 20,3150 20,2340 100,2120 230,2340 230,3150 ccw(c200,3150) 200,3180 50,3180 ccw(c50,3150)
  region net NetC46_2: 3412.88,1075 3475,1075 ccw(c3475,1085) 3485,1085 3485,1137.5 ccw(c3470,1137.5) 3470,1152.5 3342.5,1152.5 ccw(c3342.5,1135) 3325,1135 3325,791.04 ccw(c3339.57,791.03) 3329.27,780.73 3346.46,763.54 ccw(c3361.04,778.11) 3361.04,757.5 3437.5,757.5 cw(c3437.5,750) 3445,750 3445,720 cw(c3440,720) 3440,715 3322.5,715 ccw(c3322.5,705) 3312.5,705 3312.5,647.5 ccw(c3322.5,647.5) 3322.5,637.5 3370,637.5 ccw(c3370,645) 3377.5,645 3377.5,682.5 cw(c3387.5,682.5) 3387.5,692.5 3465,692.5 ccw(c3465,702.5) 3475,702.5 3475,760.04 ccw(c3450.96,760.04) 3467.96,777.04 3441.77,803.23 ccw(c3431.46,792.93) 3431.46,807.5 3365,807.5 cw(c3365,812.5) 3360,812.5 3360,1037.68 cw(c3374.13,1037.68) 3365.98,1049.22 3394.02,1069.02 cw(c3412.87,1042.32)
  region net NetC34_2: 3195,315 3195,200 ccw(c3205,200) 3205,190 3325,190 ccw(c3325,205) 3340,205 3340,312.5 ccw(c3327.5,312.5) 3327.5,325 3205,325 ccw(c3205,315)
  region net 3V3DC_S: 2942.5,512.5 3042.93,512.5 ccw(c3042.93,547.68) 3067.8,522.8 3074.7,529.7 cw(c3099.57,504.83) 3099.57,540 3358.38,540 ccw(c3358.38,557.51) 3369.96,544.38 3382.5,555.43 3382.5,580.3 3370.26,590.59 ccw(c3358.14,576.15) 3358.14,595 2972.07,595 ccw(c2972.06,565.88) 2951.46,586.46 2945.3,580.3 ccw(c2970.16,555.43) 2935,555.43 2935,520 ccw(c2942.5,520)
  region net 5VDC: 1380,662.5 1547.5,662.5 cw(c1547.5,650) 1560,650 1560,527.5 cw(c1547.5,527.5) 1547.5,515 1387.5,515 cw(c1387.5,532.5) 1370,532.5 1370,652.5 cw(c1380,652.5)
  region net 5VDC: 1015,1470 1107.5,1470 cw(c1107.5,1457.5) 1120,1457.5 1120,1287.5 cw(c1107.5,1287.5) 1107.5,1275 1017.5,1275 cw(c1017.5,1287.5) 1005,1287.5 1005,1460 cw(c1015,1460)
  region net GND_S: 3459.44,277.45 3441.94,259.95 3441.94,277.45
  region net GND_S: 3026.25,1081.25 3008.75,1063.75 3026.25,1063.75
  region net GND_S: 3048.75,1081.25 3066.25,1063.75 3048.75,1063.75
  region net GND_S: 3243.75,1261.25 3226.25,1278.75 3243.75,1278.75
  region net GND_S: 2995,805 3080,805 3080,930 3077.5,932.5 3030,932.5 3030,1002.5 3080,1002.5 3080,1067.5 2995,1067.5
  region net 3V3DC_S: 3270.05,611.94 3287.55,594.44 3270.05,594.44
  region net 3V3DC_S: 3231.25,593.75 3248.75,611.25 3248.75,593.75
  region net 3V3DC_S: 3230,1012.5 3252.5,990 3252.5,1015 3260,1022.5
  region net GND_S: 2990.78,455 3042.17,427.5 3397.54,427.5 3427.5,457.46 3427.5,470 3012.5,470 3005,477.5
  region net 5VDC: 1041.25,1253.75 1013.84,1281.16 1105.59,1282.55 1075.54,1253.75
  region net 5VDC: 983.75,1375 1011.25,1402.5 1012.5,1320 983.75,1350
GND (plane layer: these items are gaps in the copper):
  region: 2.5,1185 342.5,1185 342.5,457.5 -2.5,457.5
  region: -9.31,3917.62 -9.31,3182.62 540.69,3182.62 540.69,3102.44 2830.69,3182.62 2830.69,3917.62
  region: 1585.69,3197.62 1585.69,2912.62 2840.69,2912.62 2840.69,3192.62 2835.69,3197.62
  region: 540.69,3176.67 540.69,2237.62 1283.19,2237.62 1750.69,2705.12 1750.69,3159.83 1772.21,3081.15 1770,3152.5 1730.16,3167.62
  lines w50: 2820,20 2820,3905 ; 2845,15 2845,1435
POWER (plane layer: these items are gaps in the copper):
  region: 20,1187.5 360,1187.5 360,460 15,460
  region: 550,3169.05 550,2230 1292.5,2230 1760,2697.5 1786.92,2881.48 1805.02,2887.48 1807.86,2884.64 1760,3159.85
  region: 1595,3190 1595,2905 2850,2905 2850,3185 2845,3190
  region: 0,3910 0,3175 550,3175 550,3094.82 2840,3175 2840,3910
  lines w30: 480,2020 480,2145 560,2225 1305,2225 1775,2695 1775,2855 1825,2905 1945,2905 1985,2865 1985,2740 2025,2700 2250,2700 2295,2745 2295,2855 2345,2905 2475,2905 2535,2845 2535,2670 2490,2625 1825,2625 1350,2150 805,2150 780,2125 780,1695 800,1675 905,1675 935,1645 935,1585 915,1565 705,1565 665,1605 665,1955 545,1955 480,2020 ; 1000,725 1000,1465 1035,1500 1125,1500 1160,1465 1160,1265 1085,1190 1085,850 1150,785 1425,785 1570,640 1570,610 1570,530 1540,500 1475,500 1375,500 1345,530 1345,630 1295,680 1045,680 1000,725
  lines w50: 2820,10 2820,3920 ; 2860,10 2860,1430

## Silkscreen, mask and mechanical layers (free items; w line width, h text height)
Top Overlay:
  drawing of 46 lines, arcs and shapes, not listed
  text "Nisanur Mahmutoglu" at 3760.98,165.91 h39.37 r90
Drill Guide:
  the board outline again, w11.81
Route Tool Path:
  lines w50: 2850,10 2850,225 ; 2850,500 2850,700 ; 2850,800 2850,1000 ; 2850,1250 2850,3925

## Text inside footprints (layer, text, board x,y; h text height)
D5: Top Overlay "INPUT" at 634.1,3459.33 h39.37 r180; Top Overlay "OUTPUT" at 1518.43,2275.28 h39.37
J6: Top Overlay "1" at 2527.56,740.16 h59.06
J7: Top Overlay "1" at 2339.85,1843.76 h50 r90; Top Overlay "5" at 2339.85,2466.56 h50 r90
J8: Top Overlay "1" at 3078.74,543.31 h59.06
S2: Top Overlay "D" at 3356.42,1071.52 h39.37; Top Overlay "S" at 3444.61,1206.95 h39.37; Top Overlay "G" at 3222.95,1200.26 h39.37